# Altium PCB Driveunit_RS485.PcbDoc
Units mm, origin at the board's own origin, x right, y up, seen from the top; angles counter-clockwise.
Board outline 32.16 x 32.01 mm, 4 copper layers (Top Layer, MidLayer1, MidLayer2, Bottom Layer), stack 1.57 mm thick; 41 components, 30 nets, 141 pads, 78 vias.
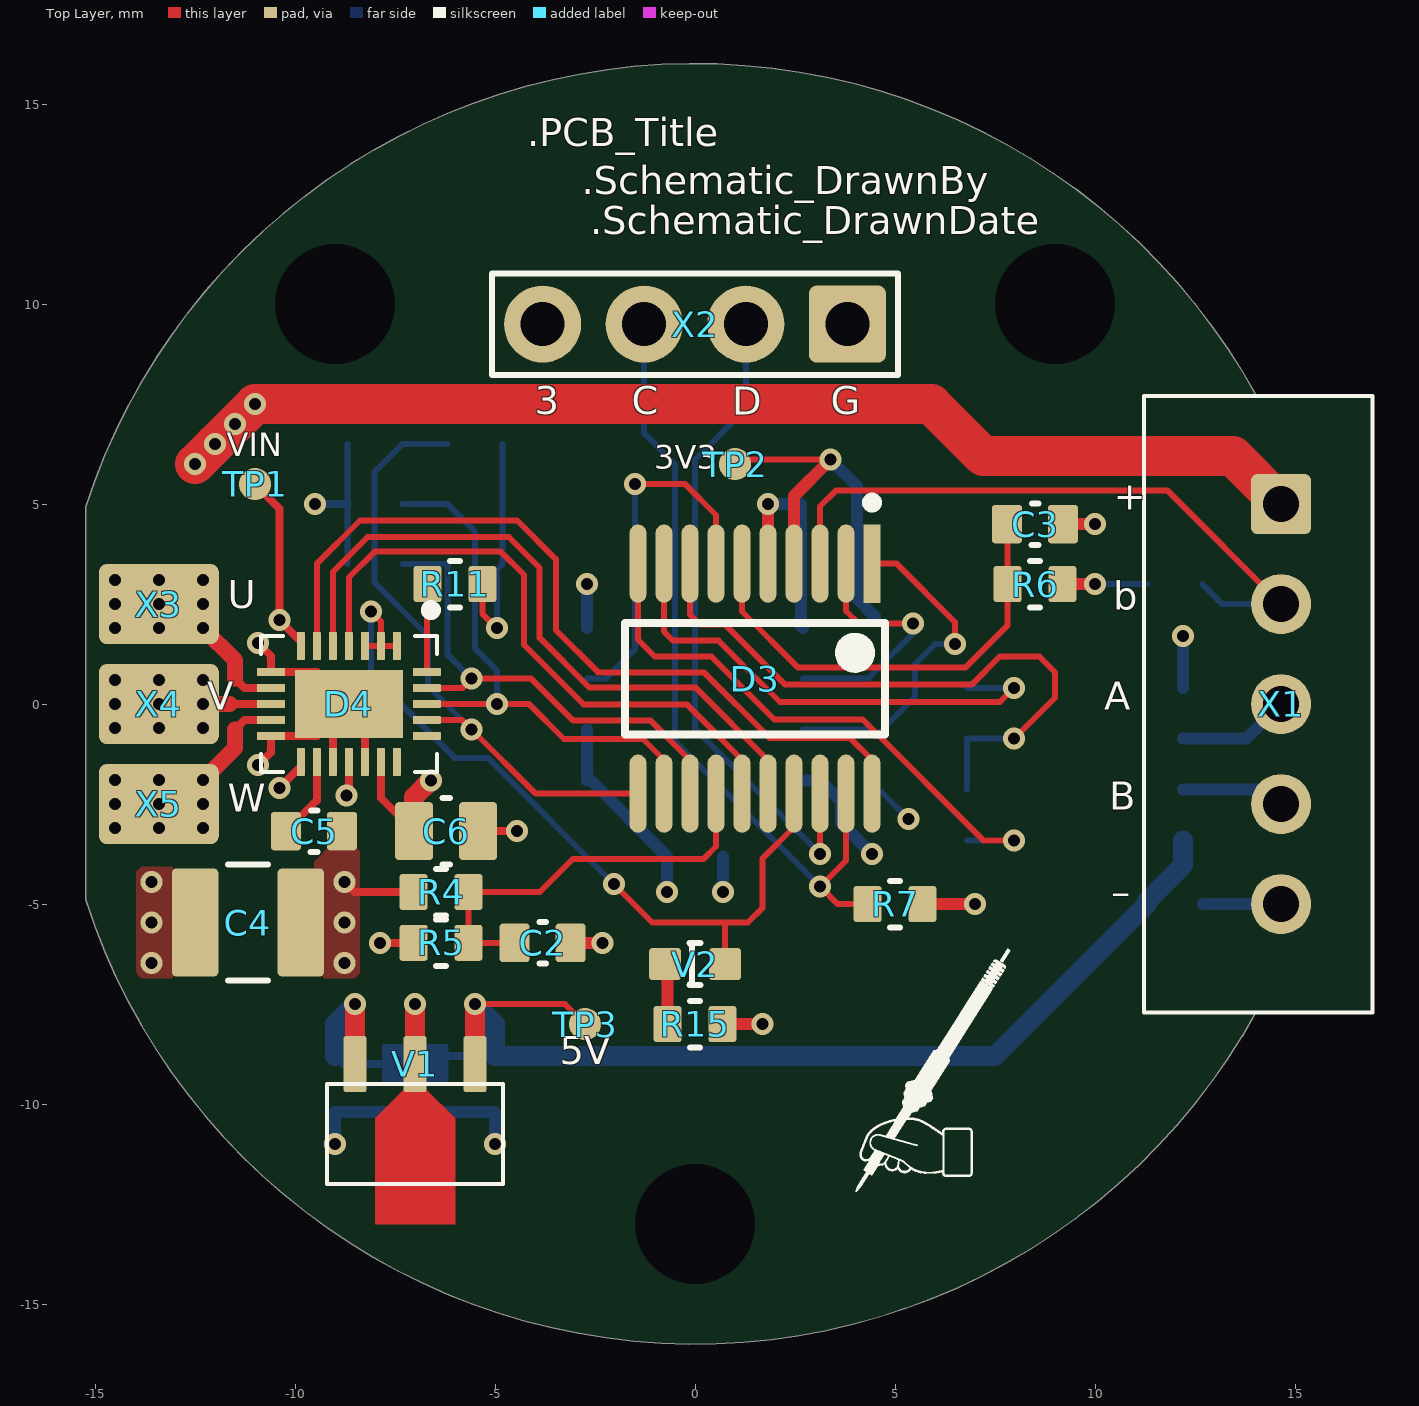
[diagram p0: Top Layer view]
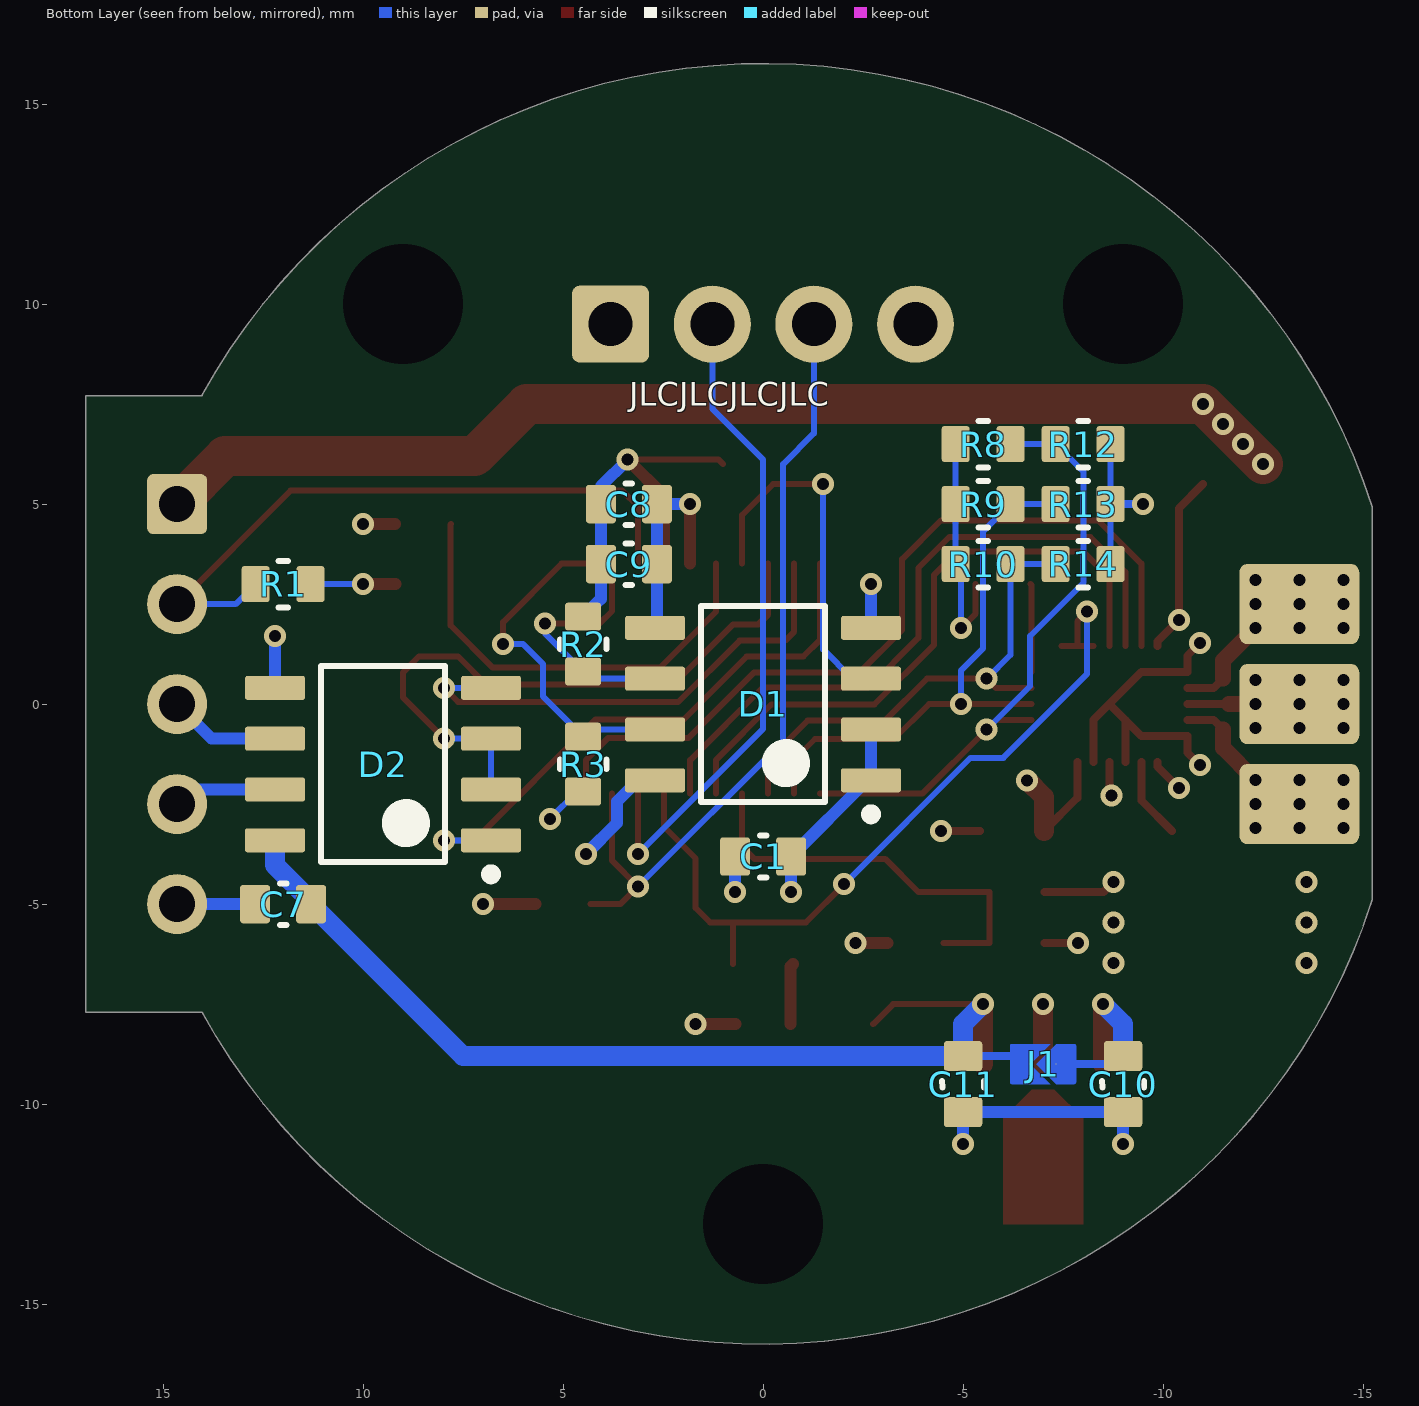
[diagram p1: Bottom Layer view, seen from below]
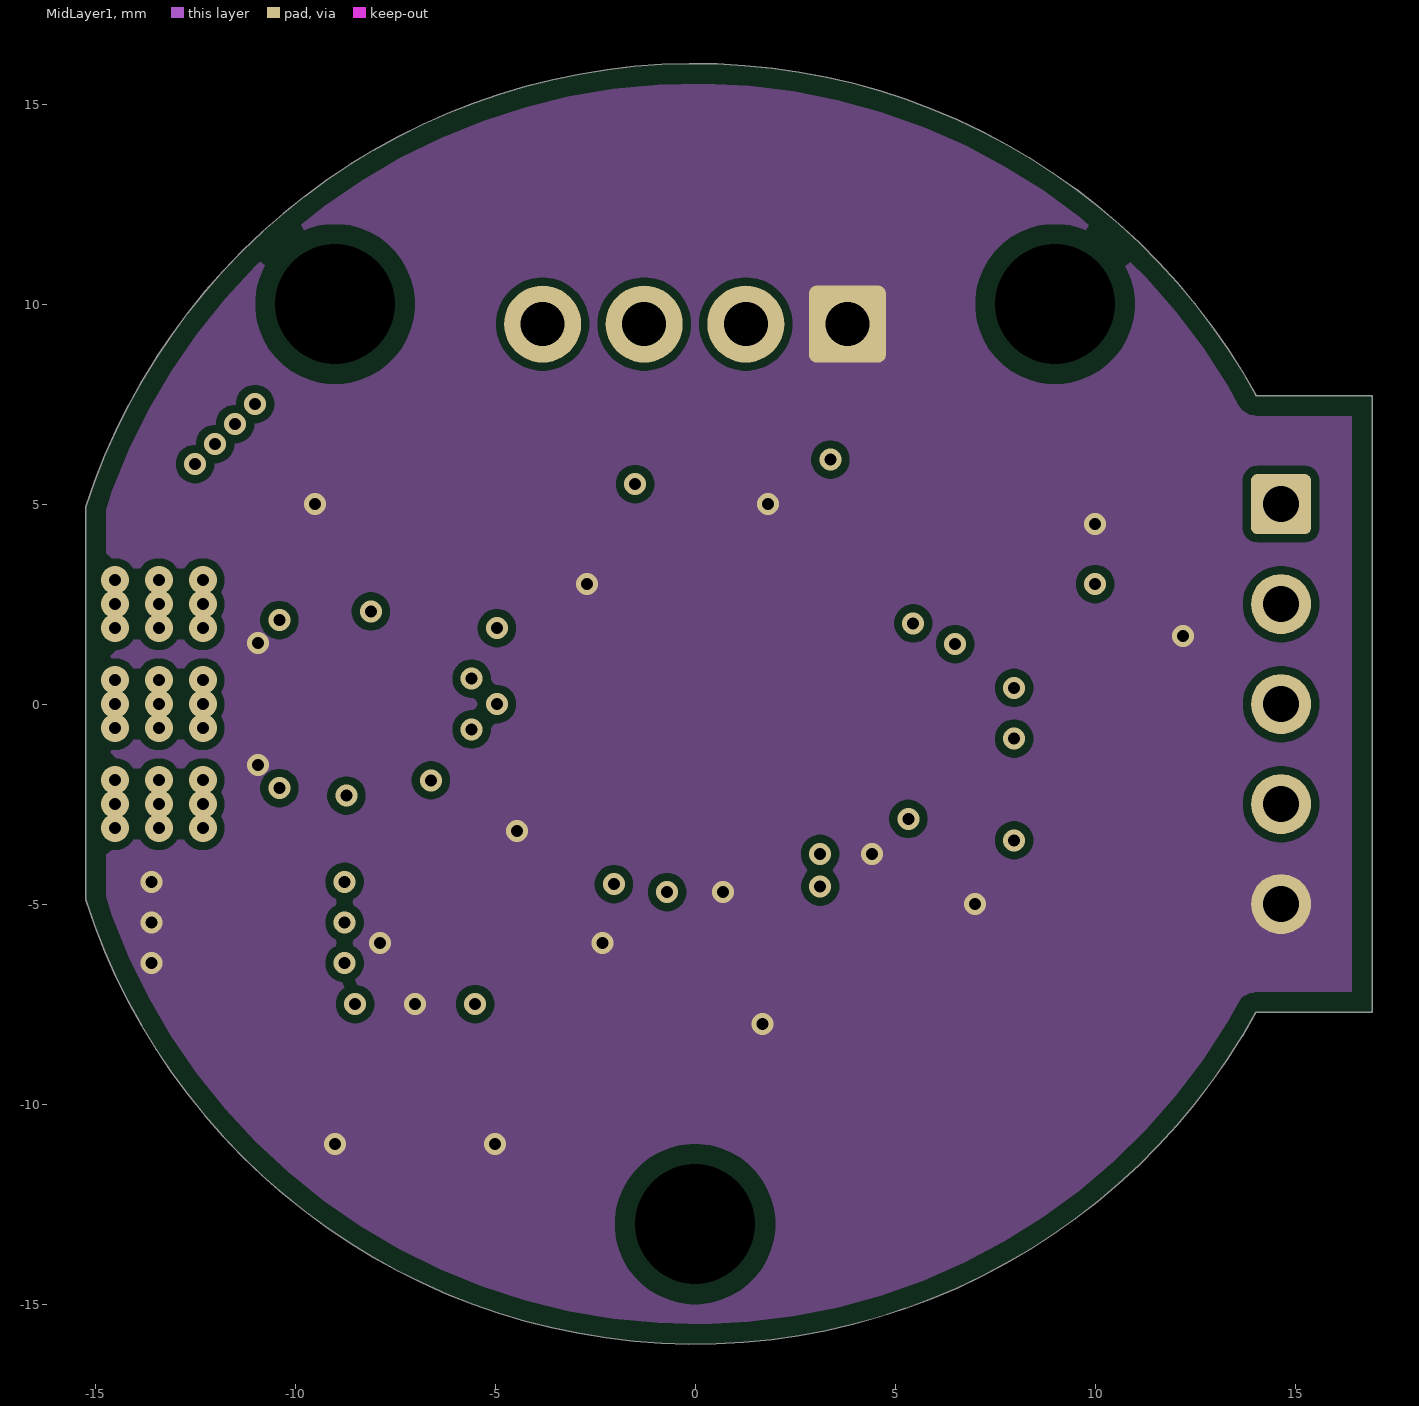
[diagram p2: MidLayer1]
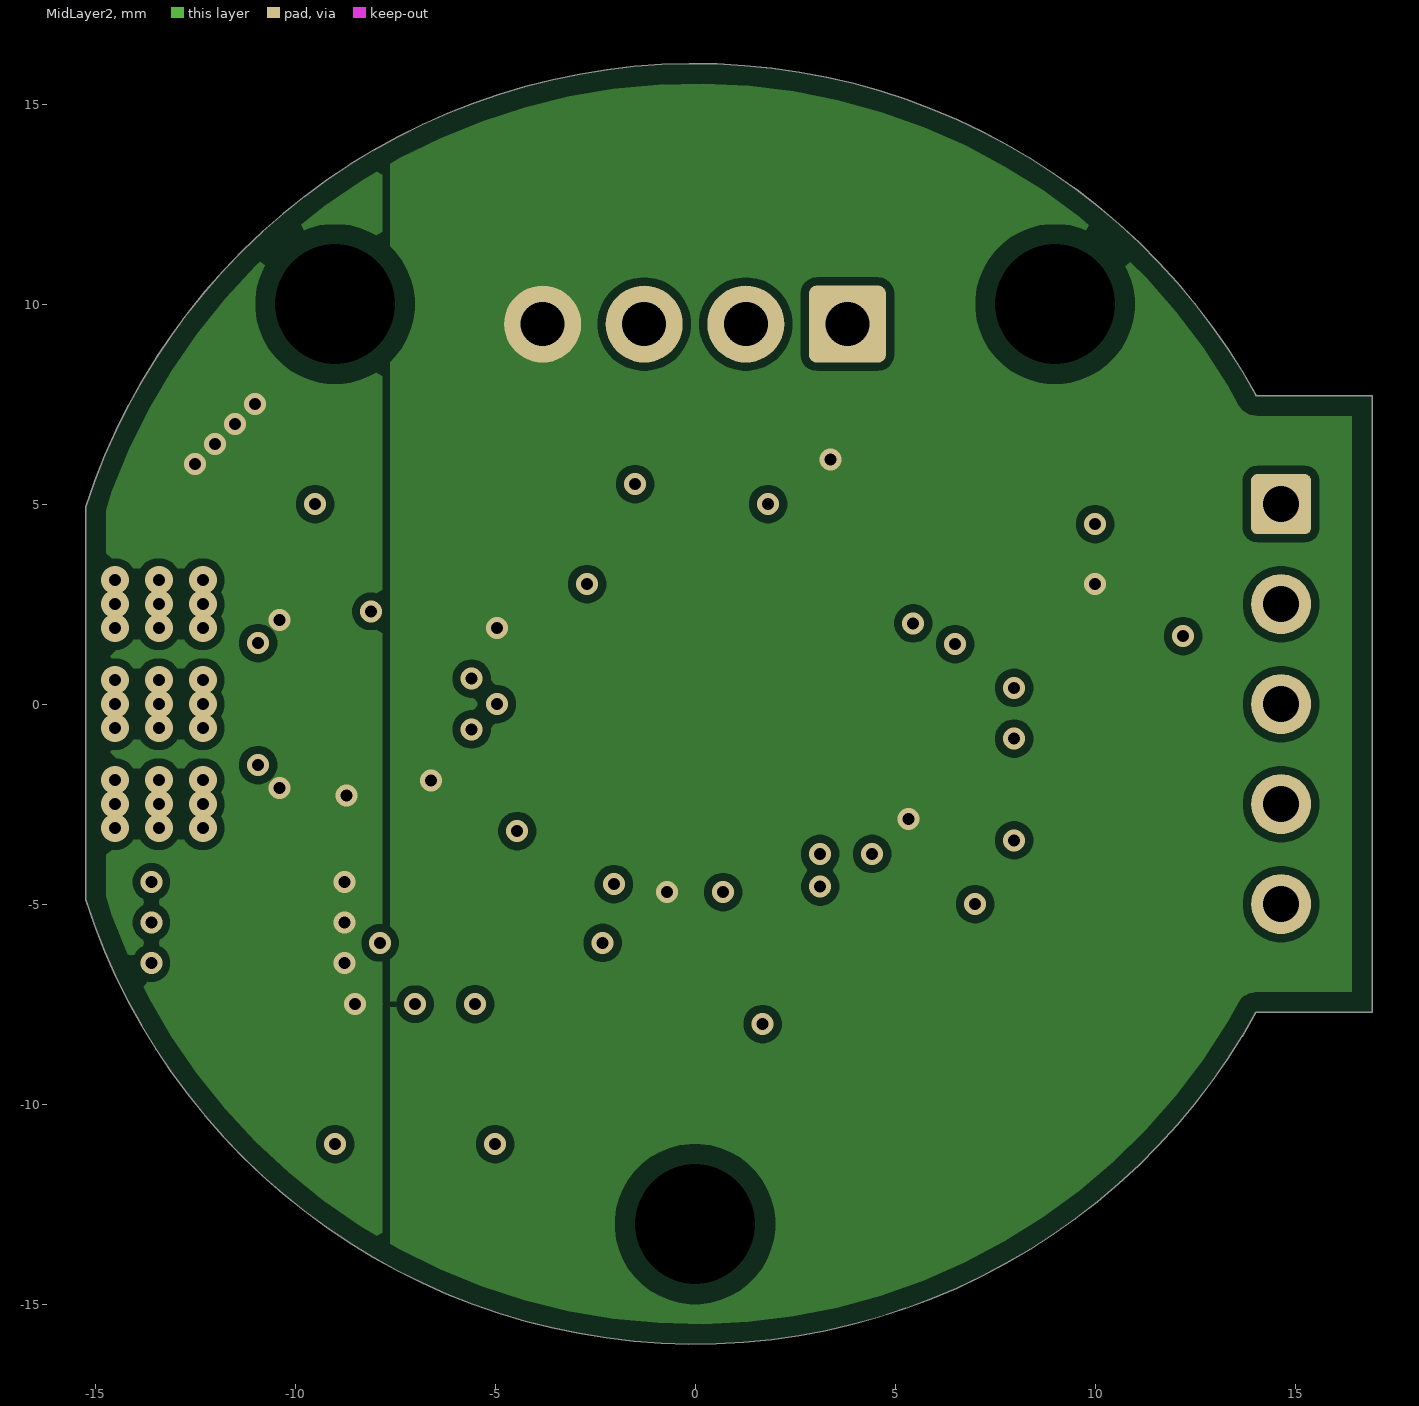
[diagram p3: MidLayer2]
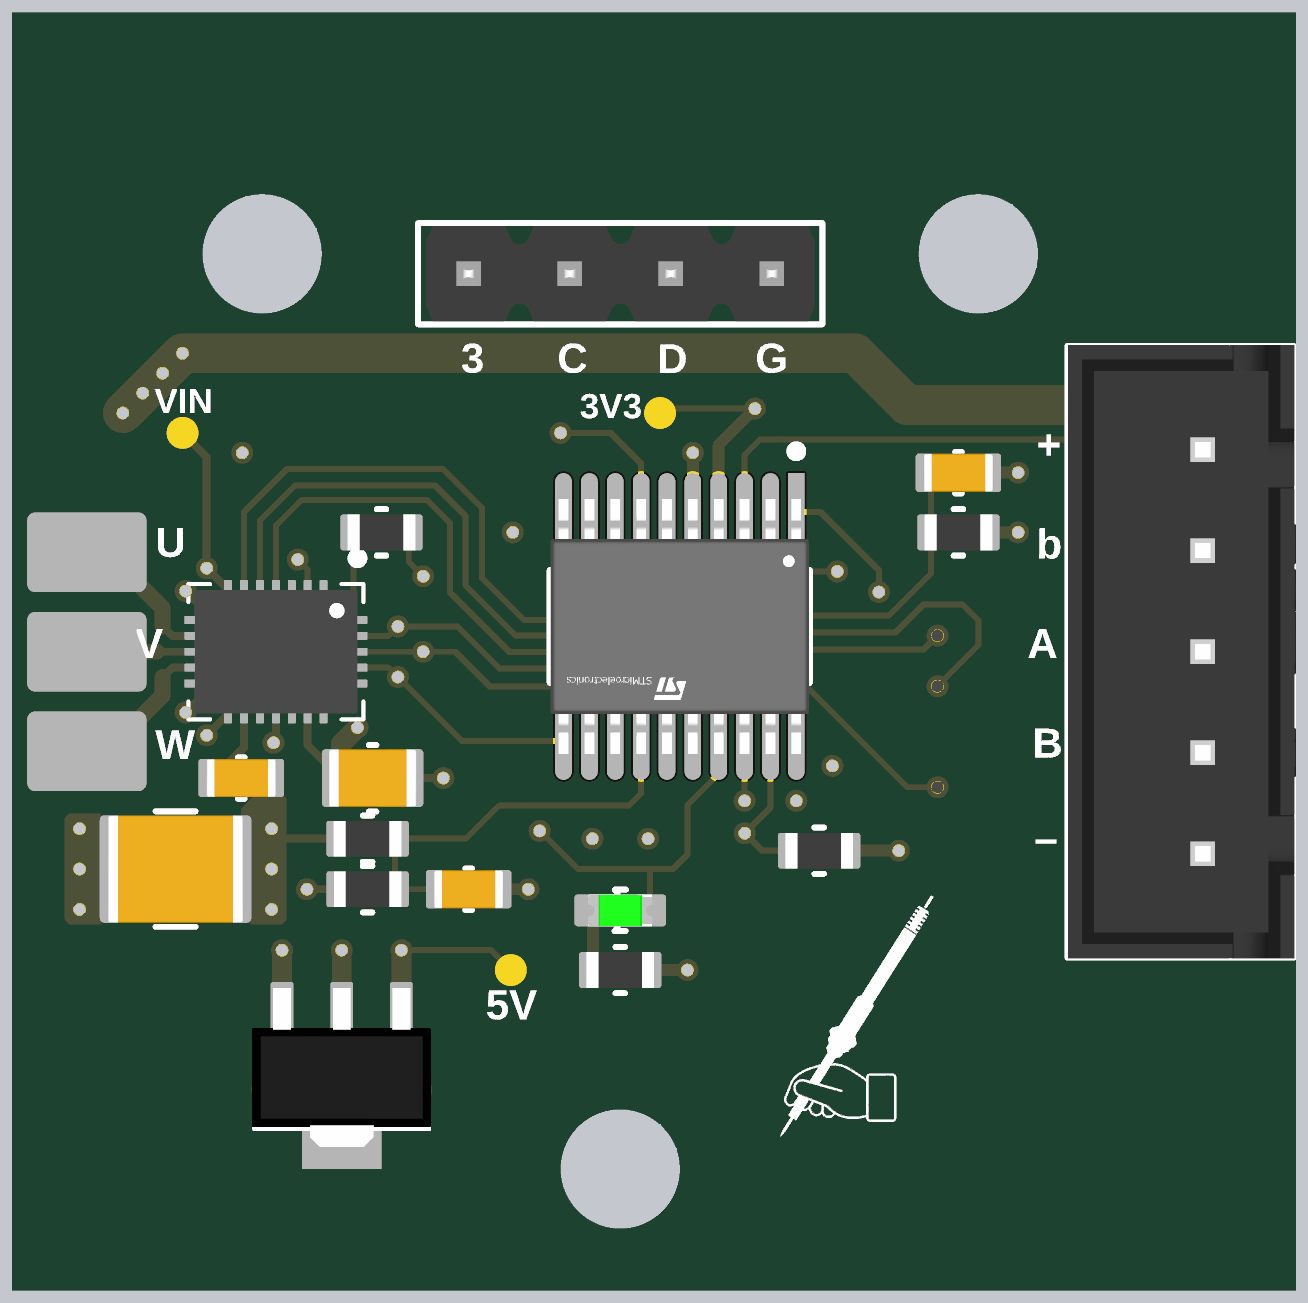
[diagram p4: 3D render of the assembled board from above, using the file's embedded part models]
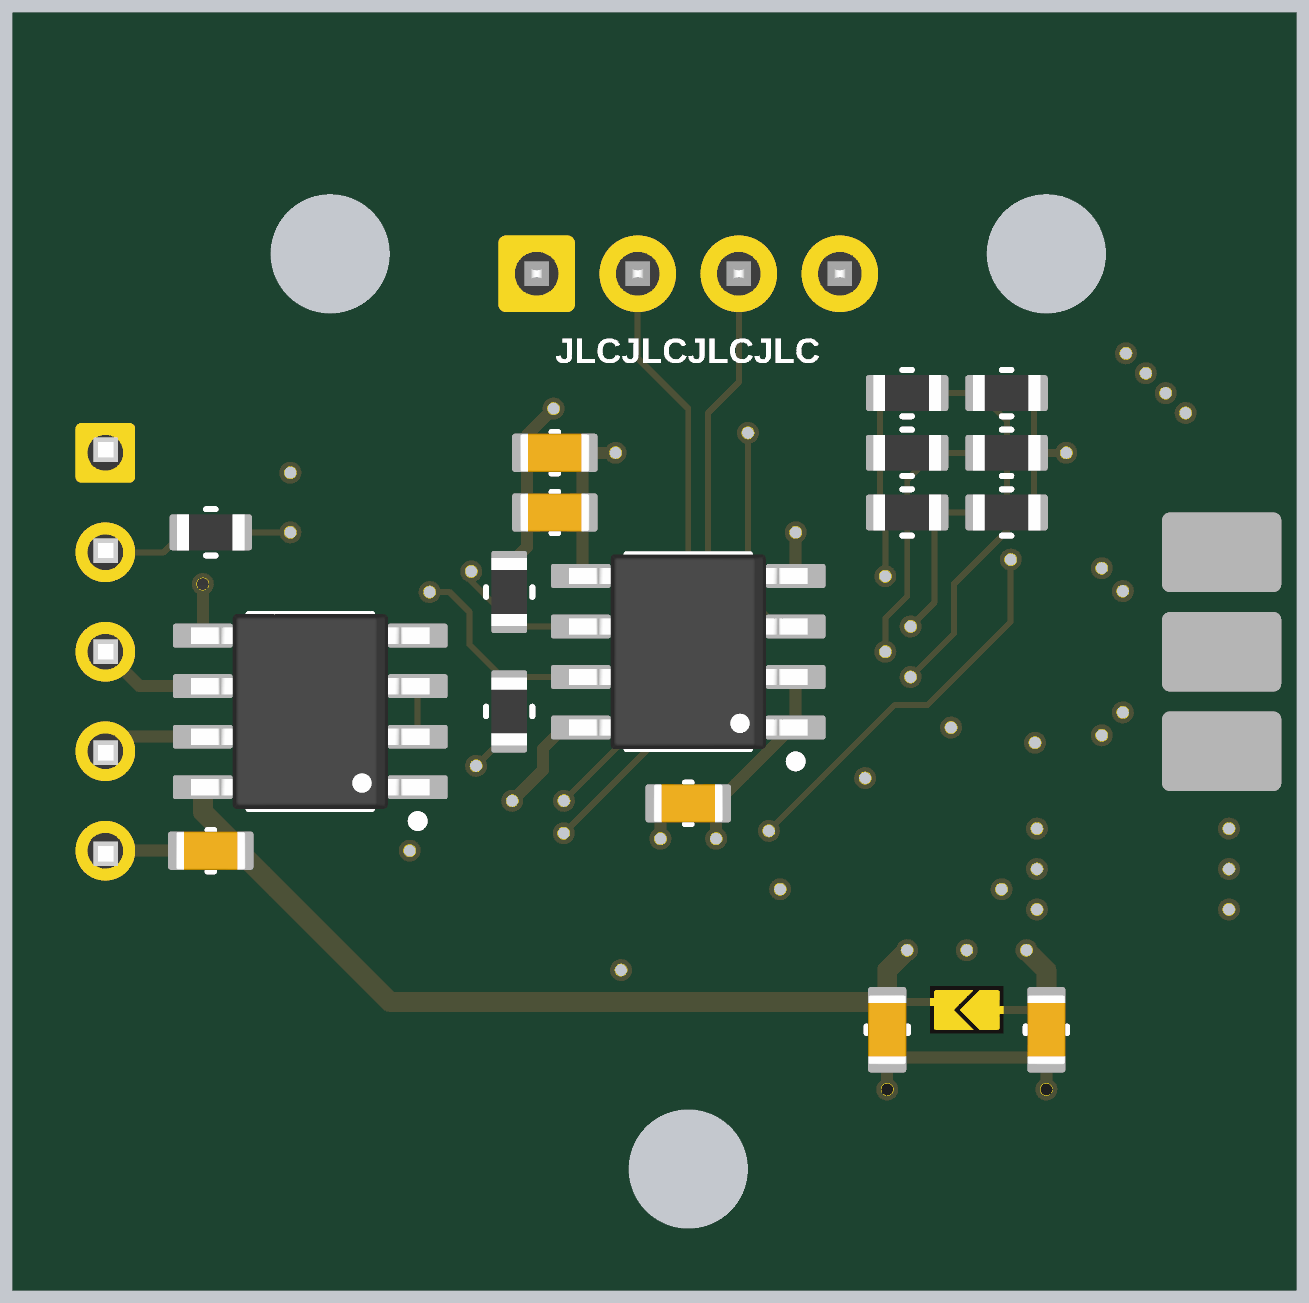
[diagram p5: 3D render of the assembled board from below, using the file's embedded part models]

## Layer stack, top to bottom
Top Solder: solder mask 0.01, Solder Resist, Dk 3.5
Top Layer: signal copper 0.035
Dielectric1: prepreg 0.18, FR-4 (7628), Dk 4.2
Dielectric 2: prepreg 0.18, FR-4 (7628), Dk 4.2
MidLayer1: signal copper 0.035
Core: core 0.71, Dk 4.2
MidLayer2: signal copper 0.035
Dielectric 3: prepreg 0.18, FR-4 (7628), Dk 4.2
Dielectric 4: prepreg 0.18, FR-4 (7628), Dk 4.2
Bottom Layer: signal copper 0.035
Bottom Solder: solder mask 0.01, Solder Resist, Dk 3.5

## Board outline
-15.235,-4.888 ccw(c0,0) 14.021,-7.707 16.929,-7.707 16.929,7.707 14.021,7.707 14.032,7.713 ccw(c0,0) -15.235,4.927

## Design rules (kind name [scope] priority, off if disabled: settings)
AssemblyTestPointUsage [IsTestpoint] p1:
AssemblyTestpoint [IsTestpoint] p1 off: testpointundercomponent=TRUE minsize=0.8 maxsize=1.6 preferedsize=0.85 minholesize=0 maxholesize=0 preferedholesize=0 testpointgrid=0.025 usegrid=FALSE gridtolerance=0 allowsidetop=TRUE allowsidebottom=TRUE minspacing=2.54
BoardOutlineClearance [All and not OnLayer('Top Overlay')] p1: gap=0.5 ignorepadtopadclearanceinfootprint=FALSE except(0: Arc-SplitContinuation Track-SplitContinuation SMDPad-SplitContinuation Fill-SplitContinuation Poly-SplitContinuation Region-SplitContinuation Text-SplitContinuation; 1.5: THPad-SplitContinuation Via-SplitContinuation)
Clearance Clearance_NetClasses [InNetClass('PrimarySide') vs InNetClass('SecondarySide')] p1: gap=1 ignorepadtopadclearanceinfootprint=FALSE except(0: Arc-Hole Track-Hole SMDPad-Hole THPad-Hole Via-Hole Fill-Hole Poly-Hole Region-Hole Text-Hole)
Clearance Clearance_Pri-PE [InNetClass('PrimarySide') vs InNet('EARTH') or InNet('EARTH_G2') or InNet('EARTH_USB') or InNet('NetC3_2')] p2: gap=1 ignorepadtopadclearanceinfootprint=FALSE except(0: Arc-Hole Track-Hole SMDPad-Hole THPad-Hole Via-Hole Fill-Hole Poly-Hole Region-Hole Text-Hole)
Clearance Clearance_Sec-PE [InNetClass('SecondarySide') vs InNet('EARTH') or InNet('EARTH_G2') or InNet('EARTH_USB') or InNet('NetC3_2')] p3: gap=0.5 ignorepadtopadclearanceinfootprint=FALSE except(0: Arc-Hole Track-Hole SMDPad-Hole THPad-Hole Via-Hole Fill-Hole Poly-Hole Region-Hole Text-Hole)
Clearance Clearance_KeepOut [OnLayer('Keep-Out Layer')] p4: gap=0.5 ignorepadtopadclearanceinfootprint=FALSE except(0: Arc-Hole Track-Hole SMDPad-Hole THPad-Hole Via-Hole Fill-Hole Poly-Hole Region-Hole Text-Hole)
Clearance Clearance2Holes [not OnTopLayer AND NOT OnBottomLayer vs (ObjectKind = 'Pad') And (Layer = 'MultiLayer') And (PadIsPlated = 'False')] p5: gap=0.5 ignorepadtopadclearanceinfootprint=FALSE except(0: Arc-Hole Track-Hole SMDPad-Hole THPad-Hole Via-Hole Fill-Hole Poly-Hole Region-Hole Text-Hole)
Clearance Clearance_via2via [IsVia and not Footprint vs IsVia] p6: gap=0.15 ignorepadtopadclearanceinfootprint=FALSE except(0: Arc-Hole Track-Hole SMDPad-Hole THPad-Hole Via-Hole Fill-Hole Poly-Hole Region-Hole Text-Hole)
Clearance [All] p7: gap=0.2 ignorepadtopadclearanceinfootprint=FALSE except(0: Arc-Hole Track-Hole SMDPad-Hole THPad-Hole Via-Hole Fill-Hole Poly-Hole Region-Hole Text-Hole)
ComponentClearance [IsComponent] p1: gap=0.254 collisioncheckmode=3 verticalgap=0.254 showdistances=TRUE donotcheckwithout3dbody=TRUE
DiffPairsRouting [All] p1: maxlimit=0.254 minlimit=0.2 mostfreqgap=0.254 toplayer_minwidth=0.15 toplayer_maxwidth=0.381 toplayer_prefwidth=0.381 midlayer1_minwidth=0.15 midlayer1_maxwidth=0.381 midlayer1_prefwidth=0.381 midlayer2_minwidth=0.15 midlayer2_maxwidth=0.381 midlayer2_prefwidth=0.381 bottomlayer_minwidth=0.15 bottomlayer_maxwidth=0.381 bottomlayer_prefwidth=0.381 maxuncoupledlength=12.7
FabricationTestPointUsage [IsTestpoint] p1: valid=0 allowmultiple=FALSE
FabricationTestpoint [IsTestpoint] p1 off: side=3 testpointundercomponent=TRUE minsize=0.8 maxsize=1.6 preferedsize=0.85 minholesize=0 maxholesize=0 preferedholesize=0 testpointgrid=0.025 allowsidetop=TRUE allowsidebottom=TRUE usegrid=FALSE gridtolerance=0 minspacing=2.54 boardedgeclearance=1.9
HoleSize [All] p1: absolutevalues=TRUE maxlimit=6.4 minlimit=0.2 maxpercent=80.000 minpercent=20.000
MinimumAnnularRing MinimumAnnularRingVia [IsVia] p1: minimumring=0.12
MinimumAnnularRing MinimumAnnularRingDefault [All] p2: minimumring=0.15
MinimumSolderMaskSliver MinimumSolderMaskSliver_Symbols [IsComponent] p1: minsoldermaskwidth=0
MinimumSolderMaskSliver [All] p2: minsoldermaskwidth=0.1
PlaneClearance PlaneClearance_PE [InNet('EARTH_USB')  or InNet('EARTH_G2') or InNet('NetC3_2') or InNet('EARTH')] p1: clearance=1
PlaneClearance PlaneClearance_Holes-via [(IsVia)] p2: clearance=0.35
PlaneClearance PlaneClearance_Holes-Special [(InComponentClass('SpecialConnector'))] p3: clearance=0.35
PlaneClearance [All] p4: clearance=0.5
PlaneConnect "PlaneConnect_Special Con" [(InComponentClass('SpecialConnector'))] p1: planeconnectstyle=Direct reliefexpansion=0.508 reliefentries=4 reliefconductorwidth=0.254 reliefairgap=0.254
PlaneConnect PlaneConnect_Components [(InComponentClass('All Components'))] p2: planeconnectstyle=Relief reliefexpansion=0.35 reliefentries=4 reliefconductorwidth=0.25 reliefairgap=0.25
PlaneConnect [All] p3: planeconnectstyle=Direct reliefexpansion=0.508 reliefentries=4 reliefconductorwidth=0.254 reliefairgap=0.254
PolygonConnect PolygonConnect_Components [(InComponentClass('All Components'))] p1: connectstyle=Direct reliefconductorwidth=0.254 reliefentries=4 polygonreliefangle="90 Angle" airgapwidth=0.254
PolygonConnect [All] p2: connectstyle=Direct reliefconductorwidth=0.254 reliefentries=4 polygonreliefangle="90 Angle" airgapwidth=0.254
RoutingVias Micro-Vias [((ObjectKind = 'Via') AND (StartLayer = 'Top Layer') AND (StopLayer = 'InternalPlane1')) OR ((ObjectKind = 'Via') AND (StartLayer = 'Bottom Layer') AND (StopLayer = 'InternalPlane2'))] p1: holewidth=0.15 width=0.35 viastyle="Through Hole" minholewidth=0.15 minwidth=0.35 maxholewidth=0.15 maxwidth=0.35
RoutingVias [All] p2: holewidth=0.2 width=0.55 viastyle="Through Hole" minholewidth=0.2 minwidth=0.55 maxholewidth=0.3 maxwidth=0.7 useviatemplates=TRUE viatemplateguid#1={409902A1-507B-49B3-8F71-9776A71DEEE2} viatemplateguid#2={2196D2C4-073D-4DA6-BD0C-B2EDFBD47095} viatemplatename#1=v55h30m0mx0 viatemplatename#2=v70h30m0mx0
SilkToSilkClearance [All] p1: silktosilkclearance=0.2
SilkToSolderMaskClearance SilkToPadClearance [IsPad] p1: minsilkscreentomaskgap=0.2 clearancetoexposedcopper=TRUE
SolderMaskExpansion SolderMaskExpansionVias [IsVia] p1: expansion=0.15 istentingtop=FALSE soldermaskfromhole=TRUE
SolderMaskExpansion SolderMaskExpansionHoles [(ObjectKind = 'Pad') And (PadIsPlated = 'False') And (AsMM(PadXSize_AllLayers) = 0) And (AsMM(PadYSize_AllLayers) = 0)] p2: expansion=0.05 istentingtop=FALSE soldermaskfromhole=TRUE
SolderMaskExpansion SolderMaskExpansionSTD [IsPad  Or IsRegion] p3: expansion=0.05 istentingtop=FALSE
ViasUnderSMD ViasUnderSMD_TP [HasFootprint('TP_1.0mm')] p1: allowed=TRUE
ViasUnderSMD [All] p2 off: allowed=FALSE
Width [All] p1: maxlimit=2 minlimit=0.15 preferedwidth=0.2 minimp=50.000000 maximp=50.000000 favimp=50.000000
18 further rules are at their usual default settings.

## Classes and differential pairs
component class Through-Hole_Assy: X1 X2
component class Testpoint: TP1 TP2 TP3 X3 X4 X5
component class Surface_Assy: C1 C2 C3 C4 C5 C6 C7 C8 C9 C10 C11 D1 D2 D3 D4 J1 R1 R2 R3 R4 R5 R6 R7 R8 R9 R10 R11 R12 R13 R14 R15 V1 V2

## Components (designator, comment, footprint, x,y, rotation, side; value= is the part's Value field where it differs from the comment)
C1 "Cap 1u 0603" C-0603_1608_095_L_RF 0,-3.81 r180 bottom value=1µF
C2 "Cap 10n 0603" C-0603_1608_095_L_RF -3.81,-5.969 r180 top value=10nF
C3 "Cap 100n 0603" C-0603_1608_095_L_RF 8.5,4.5 r180 top value=100nF
C4 "CAP 10u 1210" C-1210_3225_230_L_RF -11.176,-5.461 r0 top value=10µF
C5 "Cap 1u 0603" C-0603_1608_095_L_RF -9.525,-3.175 r0 top value=1µF
C6 "CAP 10u 16V 0805" C-0805_2012_145_L_RF -6.223,-3.175 r180 top value=10µF
C7 "Cap 100n 0603" C-0603_1608_095_L_RF 12,-5 r180 bottom value=100nF
C8 "Cap 100n 0603" C-0603_1608_095_L_RF 3.354,5 r0 bottom value=100nF
C9 "Cap 1u 0603" C-0603_1608_095_L_RF 3.354,3.5 r0 bottom value=1µF
C10 "Cap 100n 0603" C-0603_1608_095_L_RF -9,-9.5 r90 bottom value=100nF
C11 "Cap 100n 0603" C-0603_1608_095_L_RF -5,-9.5 r90 bottom value=100nF
D1 "AS5600" SOIC8_N_RF 0,0 r0 bottom
D2 "MAX485ESA" SOIC8_N_RF 9.5,-1.5 r0 bottom
D3 "STM32G030F6P6" TSSOP20_N_RF 1.5,0.635 r270 top
D4 "MP6543HGL" QFN24_5X7_N_RF -8.655,0 r270 top
J1 "Solder jumper 2Pin" J-1206_Solderjumper_2Pin -7,-9 r0 bottom value=Jumper
R1 "Res 10k 0603" R-0603_1608_050_L_RF 12,3 r180 bottom value=10k
R2 "Res 1k 0603" R-0603_1608_050_L_RF 4.5,1.5 r90 bottom value=1k
R3 "Res 1k 0603" R-0603_1608_050_L_RF 4.5,-1.5 r270 bottom value=1k
R4 "Res 10k 0603" R-0603_1608_050_L_RF -6.35,-4.699 r180 top value=10k
R5 "Res 1k 0603" R-0603_1608_050_L_RF -6.35,-5.969 r0 top value=1k
R6 "Res 10k 0603" R-0603_1608_050_L_RF 8.5,3 r180 top value=10k
R7 "Res 1k 0603" R-0603_1608_050_L_RF 5,-5 r180 top value=1k
R8 "Res 10k 0603" R-0603_1608_050_L_RF -5.5,6.5 r0 bottom value=10k
R9 "Res 10k 0603" R-0603_1608_050_L_RF -5.5,5 r0 bottom value=10k
R10 "Res 10k 0603" R-0603_1608_050_L_RF -5.5,3.5 r0 bottom value=10k
R11 "Res 1k 0603" R-0603_1608_050_L_RF -6,3 r0 top value=1k
R12 "Res 10k 0603" R-0603_1608_050_L_RF -8,6.5 r0 bottom value=10k
R13 "Res 10k 0603" R-0603_1608_050_L_RF -8,5 r0 bottom value=10k
R14 "Res 10k 0603" R-0603_1608_050_L_RF -8,3.5 r0 bottom value=10k
R15 "Res 1k 0603" R-0603_1608_050_L_RF 0,-8 r180 top value=1k
TP1 "TestPoint 0.8mm" TP_0.8mm -11,5.5 r90 top value=TP
TP2 "TestPoint 0.8mm" TP_0.8mm 1,6 r90 top value=TP
TP3 "TestPoint 0.8mm" TP_0.8mm -2.75,-8 r0 top value=TP
V1 "L78L05" SOT-89-3 -7,-10.5 r180 top
V2 "LED SMD 0603 Green" LED-0603_1608_Green_L_RF 0,-6.5 r180 top value=green
X1 "CONN HEADER XH 5POS THT" X-0149X0057-R_M05_P0250_JST_B5B-XH-A 14.65,0 r90 top locked value=B5B-XH-A
X2 "CONN HEADER 4POS 1ROW THT 2.54MM" X-0101X0025_R_FCI_77311-118-04LF 0,9.5 r180 top value=77311-118-04LF
X3 "Solderpad_2x3" LöTPAD_2X3 -13.405,2.5 r90 top
X4 "Solderpad_2x3" LöTPAD_2X3 -13.405,0 r90 top
X5 "Solderpad_2x3" LöTPAD_2X3 -13.405,-2.5 r90 top

## Footprints (in the part's own frame and the unit in brackets; to place one, negate y for a bottom-side part, rotate by r counter-clockwise, add the part's x,y. Pads: shape width x height; smd on the part's side, far side on the other; paste and mask are expansions set on the pad)
C-0603_1608_095_L_RF [mm] "Capacitor Chip 0603 Reflow; IPC7351C; Least; A.0"
  rrect20% 0.75x0.96 smd: 1(-0.7,0) 2(0.7,0)
  silkscreen extent -0.08,-0.52 0.08,0.52, body extent -0.87,-0.48 0.88,0.48, height 0.95
C-0805_2012_145_L_RF [mm] "Capacitor Chip 0805 Reflow; IPC7351C; Least; A.0"
  rrect20% 0.95x1.45 smd: 1(-0.8,0) 2(0.8,0)
  silkscreen extent -0.09,-0.83 0.09,0.84, body extent -1.1,-0.72 1.11,0.73, height 1.45
C-1210_3225_230_L_RF [mm] "Capacitor Chip 1210 Reflow; IPC7351C; Least; A.1"
  rrect20% 1.17x2.7 smd: 1(-1.32,0) 2(1.32,0)
  silkscreen extent -0.5,-1.45 0.5,1.45, body extent -1.7,-1.35 1.7,1.35, height 2.3
J-1206_Solderjumper_2Pin [mil] "SolderJumper 2Pin"
  round 1 smd paste-99999 mask+1.18: 1(-12.8,0) 2(12.8,0)
  Top Layer region: 32.48,-17.72 32.48,17.72 32.33,18.47 31.9,19.11 31.27,19.53 30.51,19.68 30.51,19.69 -6.89,19.69 12.8,0 -6.89,-19.69 30.51,-19.69 31.26,-19.54 31.9,-19.11 32.33,-18.47 32.48,-17.72
  Top Layer region: -32.48,-17.72 -32.48,17.72 -32.33,18.47 -31.9,19.11 -31.27,19.53 -30.51,19.68 -30.51,19.69 -12.8,19.69 6.89,0 -12.8,-19.69 -30.51,-19.69 -31.27,-19.54 -31.9,-19.11 -32.33,-18.47 -32.48,-17.72
LED-0603_1608_Green_L_RF [mm] "LED Chip 0603 Reflow_Green, LTST-C190KGKT"
  rrect20% 0.8x0.8 smd: 1(-0.75,0) 2(0.75,0)
  silkscreen extent -0.14,-0.52 0.14,0.52, body extent -0.81,-0.4 0.81,0.4, height 0.75
LöTPAD_2X3 [mm]
  rrect20% 2x3 smd: 1(0,0)
  rrect20% 2x3 smd far side: 1(0,0)
QFN24_5X7_N_RF [mm] "QFN, 24-Leads, Body 3.00x4.00mm, Pitch 0.40mm, Thermal Pad 1.70x2.70mm, IPC Medium Density"
  rrect20% 0.7x0.2 smd: 1(-1.45,1.2) 2(-1.45,0.8) 3(-1.45,0.4) 4(-1.45,0) 5(-1.45,-0.4) 6(-1.45,-0.8) 7(-1.45,-1.2) 13(1.45,-1.2) 14(1.45,-0.8) 15(1.45,-0.4) 16(1.45,0) 17(1.45,0.4) 18(1.45,0.8) 19(1.45,1.2)
  rrect20% 0.2x0.7 smd: 8(-0.8,-1.95) 9(-0.4,-1.95) 10(0,-1.95) 11(0.4,-1.95) 12(0.8,-1.95) 20(0.8,1.95) 21(0.4,1.95) 22(0,1.95) 23(-0.4,1.95) 24(-0.8,1.95)
  rect 1.7x2.7 smd: 25(0,0)
  silkscreen extent -2.47,-2.2 1.7,2.2, body extent -1.55,-2.05 1.55,2.05, height 1
R-0603_1608_050_L_RF [mm] "Resistor Chip 0603 Reflow; IPC7351C; Least; A.1"
  rrect20% 0.7x0.9 smd: 1(-0.685,0) 2(0.685,0)
  silkscreen extent -0.12,-0.58 0.12,0.58, body extent -0.85,-0.45 0.85,0.45, height 0.5
SOIC8_N_RF [mm] "SOIC, 8-Leads, Body 4.90x3.90mm, Pitch 1.27mm, IPC Medium Density"
  rrect20% 1.5x0.6 smd: 1(-2.7,1.905) 2(-2.7,0.635) 3(-2.7,-0.635) 4(-2.7,-1.905) 5(2.7,-1.905) 6(2.7,-0.635) 7(2.7,0.635) 8(2.7,1.905)
  silkscreen extent -2.82,-2.45 1.55,2.88, body extent -3,-2.45 3,2.45, height 1.75
SOT-89-3 [mm]
  rrect20% 0.57x1.4 smd: 1(-1.5,-1.5) 2(0,-1.5) 3(1.5,-1.5)
  Top Layer region: -0.285,-0.857 -1,-0.142 -1,2.5 1,2.5 1,-0.142 0.285,-0.857
  silkscreen extent -2.2,-1 2.2,1.5, body extent -2.25,-2.05 2.25,1.95, height 1.6
TP_0.8mm [mm] "Testpoint 0.8mm"
  round 0.8 smd paste-0.5: 1(0,0)
TSSOP20_N_RF [mm]
  rect 1.955x0.421 smd mask+0.05: 1(-2.875,2.925)
  rrect100% 1.955x0.421 smd mask+0.05: 2(-2.875,2.275) 3(-2.875,1.625) 4(-2.875,0.975) 5(-2.875,0.325) 6(-2.875,-0.325) 7(-2.875,-0.975) 8(-2.875,-1.625) 9(-2.875,-2.275) 10(-2.875,-2.925) 11(2.875,-2.925) 12(2.875,-2.275) 13(2.875,-1.625) 14(2.875,-0.975) 15(2.875,-0.325) 16(2.875,0.325) 17(2.875,0.975) 18(2.875,1.625) 19(2.875,2.275) 20(2.875,2.925)
  silkscreen extent -4.53,-3.25 1.4,3.25, body extent -4.35,-3.75 4.35,3.75, height 0.25
X-0101X0025_R_FCI_77311-118-04LF [mm] "Pin Headder; 2.54mm, FCI"
  rrect20% 1.925x1.925 hole 1.1: 1(-3.81,0)
  round 1.925 hole 1.1: 2(-1.27,0) 3(1.27,0) 4(3.81,0)
  silkscreen extent -5.08,-1.27 5.08,1.27, body extent -4.88,-1.2 4.88,1.21, height 8.38
X-0149X0057-R_M05_P0250_JST_B5B-XH-A [mm] "JST XH Connector 2.5mm Pitch JST_B5B-XH-A"
  rrect20% 1.5x1.5 hole 0.9: 1(5,0)
  round 1.5 hole 0.9: 2(2.5,0) 3(0,0) 4(-2.5,0) 5(-5,0)
  silkscreen extent -7.71,-2.29 7.71,3.43, body extent -7.71,-2.33 7.71,3.4, height 7

## Part data
C1 C5 C9: library part CMP-001-0045-3, "Cap Cer SMD 1u 16V 10% 0603 X7R", Case / Package=0603, Manufacturer=AVX, Manufacturer 2=KEMET, Manufacturer Part Number=0603YC105KAT2A, Manufacturer Part Number 2=C0603C105K4RACTU, ClassName=Surface_Assy, GPV_Number=1749.0125, PartStatus=Release, Prefered=true, Technology=SMT, User=epph
C2: library part CMP-001-0040-3, "Cap Cer SMD 10n 50V 10% 0603 X7R", Case / Package=0603, Manufacturer=AVX, Manufacturer Part Number=06035C103KAT, ClassName=Surface_Assy, GPV_Number=1749.0004, MNL_Number=22310403, PartStatus=Release, Prefered=true, Technology=SMT, User=epph
C3 C7 C8 C10 C11: library part CMP-001-0036-2, "Cap Cer SMD 100n 100V 10% 0603 X7R", Case / Package=0603, Manufacturer=MURATA, Manufacturer Part Number=GRM188R72A104KA35, ClassName=Surface_Assy, ComponentLink1Description=Datasheet, ComponentLink1URL=https://datasheet.ciiva.com/34302/1857815-34302863.pdf, GPV_Number=1749.0196, PartStatus=Release, Prefered=false, Technology=SMT, User=zupa
C4: library part CMP-001-0198-2, "CAP CER 10uF 50V X7S 1210", Case / Package=1210, Manufacturer=TDK, Manufacturer Part Number=C3225X7S1H106K250AE, ClassName=Surface_Assy, ComponentLink1Description=Datasheet, ComponentLink1URL=https://datasheet.ciiva.com/24218/c3225x7s1h106k250ae-265440-24218657.pdf?src-supplier=Mouser, GPV_Number=1752.0100, PartStatus=Release, Technology=SMT, User=zupa
C6: library part CMP-001-0177-2, "Cap Cer SMD 10u 16V 10% 0805 X5R", Case / Package=0805, Manufacturer=AVX, Manufacturer Part Number=0805YD106KAT2A, ClassName=Surface_Assy, ComponentLink1Description=Datasheet, ComponentLink1URL=https://datasheet.ciiva.com/152/cx5r-152114.pdf, GPV_Number=1750.0241, PartStatus=Release, Prefered=true, Technology=SMT, User=zupa
D1: "IC Sensor Rotation Magnet 12bit", Case/Package=SO-8, Manufacturer=AMS, ClassName=Surface_Assy, Footprint_validated=No, GPV_Number=xxxx.xxxx, Manufacturer Part Number=AS5600, MNL_Number=xxxxxxxx, Part_validated=No, PartStatus=New, System=-, Technology=SMT
D2: "IC Transceiver RS485 5V", Case/Package=SO8, Manufacturer=Maxim, ClassName=Surface_Assy, Footprint_validated=No, Manufacturer Part Number=MAX485ESA, MNL_Number=xxxxxxxx, Part_validated=No, PartStatus=New, System=-, Technology=SMT
D3: "IC MCU Cortex M0+ 32K Flash, 8K RAM, 64MHz", Case/Package=TSSOP20, Manufacturer=ST, Supplier Part Number 1=STM32G030F6P6TR, ClassName=Surface_Assy, Footprint_validated=No, GPV_Number=xxxx.xxxx, Manufacturer Part Number=STM32G030F6P6, MNL_Number=xxxxxxxx, Part_validated=No, PartStatus=New, Supplier 1="Arrow Electronics", System=-, Technology=SMT
D4: library part MP6543HGL-A-P, "Motor Driver 3-Phase 3-22V 2A", Case/Package=QFN-24, Manufacturer="Monolithic Power Systems", ClassName=Surface_Assy, Footprint_validated=No, GPV_Number=xxxx.xxxx, Manufacturer Part Number=MP6543HGL-A-P, MNL_Number=xxxxxxxx, Part_validated=No, PartStatus=New, System=-, Technology=SMT
J1: library part CMP-00136-2, ClassName=Surface_Assy, PartStatus=Release, Technology=SYM, User=epph
R1 R4 R6 R8 R9 R10 R12 R13 R14: library part CMP-001-0241-3, "Res SMD 10k 1% 0.1W 0603", Case / Package=0603, Manufacturer=YAGEO, Manufacturer Part Number=RC0603FR-0710KL, ClassName=Surface_Assy, ComponentLink1Description=Datasheet, ComponentLink1URL=https://datasheet.ciiva.com/11808/0900766b80f96399-11808280.pdf, GPV_Number=1922.0100, MNL_Number=15310022, PartStatus=Release, Prefered=true, Technology=SMT, User=zupa
R2 R3 R5 R7 R11 R15: library part CMP-001-0250-3, "Res SMD 1k 1% 0.1W 0603", Case / Package=0603, Manufacturer=YAGEO, Manufacturer Part Number=RC0603FR-071KL, ClassName=Surface_Assy, ComponentLink1Description=Datasheet, ComponentLink1URL=https://datasheet.ciiva.com/11808/0900766b80f96399-11808280.pdf, GPV_Number=1922.0011, MNL_Number=15310012, PartStatus=Release, Prefered=true, Technology=SMT, User=zupa
TP1 TP2 TP3: library part CMP-001-1515-1, ClassName=Testpoint, GPV_Number=-, PartStatus=Release, Technology=SMT, User=zupa
V1: "IC REG 5V SOT-89-3 7-30V 100mA", Case/Package=SOT-89-3, Manufacturer=ST, ClassName=Surface_Assy, Footprint_validated=No, GPV_Number=xxxx.xxxx, Manufacturer Part Number=L78L05, MNL_Number=xxxxxxxx, Part_validated=No, PartStatus=New, System=-, Technology=SMT
V2: library part CMP-001-1208-7, "LED Green LTST-C190KGKT 0603", Case / Package=0603, Manufacturer="Lite-On Inc", Manufacturer Part Number=LTST-C190KGKT, ClassName=Surface_Assy, GPV_Number=1602.0827, PartStatus=Release, Technology=SMT, User=epph
X1: library part CMP-00143-4, "CONN HEADER  5POS_JST_B5B-XH", Manufacturer=JST, Manufacturer Part Number=B5B-XH-A, ClassName=Through-Hole_Assy, GPV_Number=4401.4954, PartStatus=Release, System=Connector, Technology=THT, User=balu
X2: library part CMP-001-1284-4, "CONN HEADER 4POS 1ROW THT 2.54MM FCI 77311-118-04LF", Manufacturer=FCI, Manufacturer Part Number=77311-118-04LF, ClassName=Through-Hole_Assy, ComponentLink1Description=Datasheet, ComponentLink1URL=http://portal.fciconnect.com/Comergent//fci/drawing/77311.pdf, GPV_Number=4401.2630, PartStatus=Release, System=Connector, Technology=THT, User=zupa
X3 X4 X5: library part Lötpad_2mmx3mm, "Solderpad 2mm x 3mm", Case/Package=-, ClassName=Testpoint, Footprint_validated=No, GPV_Number=xxxx.xxxx, Manufacturer=-, Manufacturer Part Number=-, MNL_Number=xxxxxxxx, Part_validated=No, PartStatus=New, System=Connector, Technology=SMT

## Free pads (board coordinates)
  round 0 hole 3 unplated: 7(-9,10) 7(9,10) 9(0,-13)

## Via types
v1: diameter 0.55, hole 0.3, Top Layer to Bottom Layer, tented both sides, 51 vias
v2: diameter 0.7, hole 0.3, Top Layer to Bottom Layer, tented both sides, 27 vias

## Nets (pads, with @x,y where several pads share a name; then routed paths per layer and width w, separated by ;. In a path a pad name is that pad's centre, name@x,y a point inside that pad or via, vN(x,y) a via of type N, cw(c..) or ccw(c..) an arc to the next point about the centre after c; other vN are vias at no path point)
+3V3: C1.2 C6.2 C8.2 C9.2 D1.1 D1.2 D3.4 D4.18 R1.2 R2.2 R3.2 R6.1 R8.2 R9.2 R10.2 R11.2 TP2.1 X2.4 | length 27.4
  Top Layer w0.15: R11.2 -5.315,2.261 v1(-4.952,1.898) ; TP2.1 1.111,6.111 v1(3.385,6.111)
  Top Layer w0.2: D4.18 -7.855,-2.343 C6.2
  Top Layer w0.3: D3.4 2.475,5.201 v1(3.385,6.111) ; R6.1 v1(10,3)
  Top Layer w0.5: C6.2 -7.023,-2.324 v1(-6.604,-1.905)
  Bottom Layer w0.15: v1(-4.952,1.898) -4.952,3.363 R10.2 -4.815,6 R8.2 ; R3.2 4.649,-2.185 v1(5.332,-2.868) ; v1(10,3) R1.2
  Bottom Layer w0.3: D1.2 D1.1 -2.605,-1.905 C1.2 v1(-0.7,-4.699) ; v1(3.385,6.111) 4.054,5.442 C8.2 C9.2 4.054,2.631 R2.2
+5V: C7.2 C11.2 D2.8 J1.2 TP3.1 V1.1 | length 27.2
  Top Layer w0.15: v1(-5.5,-7.5) -3.25,-7.5 TP3.1
  Top Layer w0.5: V1.1 v1(-5.5,-7.5)
  Bottom Layer w0.2: -6.352,-8.8 C11.2
  Bottom Layer w0.5: v1(-5.5,-7.5) -5,-8 C11.2 7.5,-8.8 C7.2 11.3,-4.926 12.2,-4.026 D2.8
ADC_Angle: D1.3 D3.7 | length 9.2
  Top Layer w0.15: v1(-1.5,5.5) -0.247,5.5 0.525,4.728 D3.7
  Bottom Layer w0.15: D1.3 -2.234,0.635 -1.5,1.369 v1(-1.5,5.5)
ADC_CURR_U: D3.11 D4.21 R8.1 R12.2 | length 15.6
  Top Layer w0.15: D4.21 -5.823,-0.4 v1(-5.588,-0.635) -3.983,-2.24 D3.11
  Bottom Layer w0.15: R8.1 R12.2 -8.01,5.805 -8.01,3.037 -6.675,1.702 -6.675,0.452 v1(-5.588,-0.635)
ADC_CURR_V: D3.12 D4.22 R9.1 R13.2 | length 14
  Top Layer w0.15: D4.22 v1(-4.953,0) -4.149,0 -3.275,-0.874 -1.3,-0.874 -0.775,-1.399 D3.12
  Bottom Layer w0.15: R13.2 R9.1 -5.504,4.319 -5.504,1.396 -4.953,0.845 v1(-4.953,0)
ADC_CURR_W: D3.13 D4.23 R10.1 R14.2 | length 12.6
  Top Layer w0.15: D4.23 -5.823,0.4 v1(-5.588,0.635) -4.097,0.635 -3.046,-0.416 -1.111,-0.416 -0.125,-1.403 D3.13
  Bottom Layer w0.15: R14.2 R10.1 -6.185,1.232 v1(-5.588,0.635)
ADC_VIN: C2.2 D3.14 R4.1 R5.2 | length 10.4
  Top Layer w0.15: C2.2 R5.2 R4.1 -3.881,-4.699 -3.052,-3.87 0.217,-3.87 0.525,-3.561 D3.14
GND: C1.1 C2.1 C3.1 C4.1 C6.1 C7.1 C8.1 C9.1 C10.1 C11.1 D1.4 D1.5 D1.8 D2.5 D3.5 D4.8 D4.12 D4.15 D4.17 D4.25 R5.1 R7.1 R12.1 R13.1 R14.1 R15.1 V1.2 X1.5 X2.1 | length 39.1
  Top Layer w0.2: v1(-10.922,-1.524) -10.605,-1.207 D4.12 -9.455,-0.8 D4.25@-9.055,-0.4 ; v1(-10.922,1.524) -10.605,1.207 D4.8 -9.455,0.8 D4.25 ; D4.15 D4.25@-9.055,-0.4 ; D4.17 -8.255,-0.4 D4.25 ; v1(-7.874,-5.969) R5.1 ; C6.1 v1(-4.445,-3.175) ; D4.25@-9.055,-0.4 D4.25
  Top Layer w0.3: C2.1 v1(-2.31,-5.969) ; R15.1 v1(1.689,-8) ; D3.5 v1(1.825,5) ; R7.1 v1(7,-5) ; C3.1 v1(10,4.5)
  Top Layer w0.5: V1.2 v1(-7,-7.5)
  Bottom Layer w0.15: R14.1 R13.1 R12.1
  Bottom Layer w0.2: v1(-9.5,5) R13.1
  Bottom Layer w0.3: v1(-9,-11) C10.1 C11.1 v1(-5,-11) ; D1.4 v1(-2.7,3) ; v1(0.7,-4.699) C1.1 ; v1(1.825,5) C8.1 C9.1 2.654,1.951 D1.5 ; D1.8 3.123,-1.905 3.648,-2.43 3.648,-2.969 v1(4.425,-3.747) ; D2.5 v1(12.2,1.702) ; C7.1 X1.5
  other v1: -13.589,-6.477 -13.589,-5.461 -13.589,-4.445
I2C1_SCL: D1.7 D3.1 R3.1 | length 8.5
  Top Layer w0.15: D3.1 5.039,3.51 6.5,2.049 v1(6.5,1.5)
  Bottom Layer w0.15: D1.7 4.32,-0.635 R3.1 5.5,0.185 5.5,1 6,1.5 v1(6.5,1.5)
I2C1_SDA: D1.6 D3.2 R2.1 | length 6.5
  Top Layer w0.15: D3.2 3.775,2.327 4.083,2.019 v1(5.455,2.019)
  Bottom Layer w0.15: D1.6 4.32,0.635 R2.1 5.455,1.77 v1(5.455,2.019)
nBUSY: D3.3 R1.1 X1.2 | length 16.5
  Top Layer w0.15: D3.3 3.125,4.941 3.52,5.336 11.814,5.336 X1.2
  Bottom Layer w0.15: R1.1 13.185,2.5 X1.2
NetC5_1: C5.1 D4.14 | length 2
  Top Layer w0.2: C5.1 -9.455,-2.405 D4.14
NetR15_2: R15.2 V2.2 | length 1.5
  Top Layer w0.3: V2.2 -0.685,-6.565 R15.2
nRST: C3.2 D3.6 R6.2 | length 11.4
  Top Layer w0.15: D3.6 1.175,2.314 2.578,0.911 6.759,0.911 7.815,1.968 R6.2 7.815,4.485 C3.2
nSLEEP: D4.24 R11.1 | length 2.2
  Top Layer w0.15: D4.24 -6.705,2.98 R11.1
Phase_A: D4.9 X3.1 | length 2.6
  Top Layer w0.2: -11.5,0.635 -11.265,0.4 D4.9
  Top Layer w0.4: v2(-12.305,1.9) -11.5,1.095 -11.5,0.635
  other v2: -14.505,1.9 -13.405,1.9 -14.505,2.5 -13.405,2.5 -12.305,2.5 -14.505,3.1 -13.405,3.1 -12.305,3.1
Phase_B: D4.10 X4.1 | length 4.2
  Top Layer w0.2: -11.643,0 D4.10
  Top Layer w0.4: v2(-12.305,0) -12.28,0 -11.643,0
  Top Layer w0.5: v2(-13.405,0) -13.71,0.305 -13.465,0.261 -13.362,0.243 -12.399,0.071 -12.296,0.053 -12.28,0.05 -12.28,0 v2(-12.305,0) X4.1@-12.805,0
  other v2: -14.505,-0.6 -13.405,-0.6 -12.305,-0.6 -14.505,0 -14.505,0.6 -13.405,0.6 -12.305,0.6
Phase_C: D4.11 X5.1 | length 2.6
  Top Layer w0.2: -11.5,-0.635 -11.265,-0.4 D4.11
  Top Layer w0.4: v2(-12.305,-1.9) -11.5,-1.095 -11.5,-0.635
  other v2: -14.505,-3.1 -13.405,-3.1 -12.305,-3.1 -14.505,-2.5 -13.405,-2.5 -12.305,-2.5 -14.505,-1.9 -13.405,-1.9
PWM_ENABLE: D3.17 D4.1 D4.2 D4.3 V2.1 | length 20.1
  Top Layer w0.15: D4.3 D4.2 ; v1(-8.104,2.316) -7.855,2.067 D4.2 ; D4.1 D4.2 ; v1(-2.026,-4.502) -1.067,-5.461 0.745,-5.461 ; V2.1 0.75,-5.466 0.745,-5.461 ; D3.17 2.475,-3.072 1.689,-3.858 1.689,-5.092 1.321,-5.461 0.745,-5.461
  Bottom Layer w0.15: v1(-8.104,2.316) -8.104,0.754 -6.007,-1.343 -5.185,-1.343 v1(-2.026,-4.502)
PWM_U: D3.15 D4.4 | length 15.8
  Top Layer w0.15: D4.4 -8.655,3.164 -8.009,3.811 -4.858,3.811 -4.277,3.229 -4.277,1.482 -2.787,-0.007 -0.211,-0.007 1.175,-1.394 D3.15
PWM_V: D3.16 D4.5 | length 17.3
  Top Layer w0.15: D4.5 -9.055,3.303 -8.182,4.176 -4.657,4.176 -3.883,3.402 -3.883,1.655 -2.637,0.41 0.013,0.41 1.825,-1.402 D3.16
PWM_W: D3.20 D4.6 | length 20.7
  Top Layer w0.15: D4.6 -9.455,3.51 -8.376,4.589 -4.446,4.589 -3.478,3.622 -3.478,1.853 -2.421,0.795 0.221,0.795 1.861,-0.844 3.873,-0.844 4.425,-1.396 D3.20
RS485_A: D2.6 X1.3 | length 2.8
  Bottom Layer w0.3: D2.6 13.785,-0.865 X1.3
RS485_B: D2.7 X1.4 | length 2.6
  Bottom Layer w0.3: D2.7 14.285,-2.135 X1.4
SWCLK-BOOT0: D3.19 R7.2 X2.3 | length 19.8
  Top Layer w0.15: D3.19 3.775,-3.916 v1(3.13,-4.561) 3.568,-5 R7.2
  Bottom Layer w0.15: X2.3 -1.27,6.77 -0.5,6 -0.5,-0.932 v1(3.13,-4.561)
SWDIO: D3.18 X2.2 | length 16.6
  Top Layer w0.15: v1(3.125,-3.747) D3.18
  Bottom Layer w0.15: X2.2 1.27,7.381 0,6.111 0,-0.622 v1(3.125,-3.747)
UART2_DE: D2.2 D2.3 D3.8 | length 16.1
  Top Layer w0.15: D3.8 -0.125,2.233 0.116,1.992 0.745,1.992 2.251,0.486 6.918,0.486 7.621,1.189 8.606,1.189 9,0.795 9,0.16 v1(7.975,-0.865)
  Bottom Layer w0.15: D2.2 D2.3 v1(7.975,-0.865)
UART2_RX: D2.1 D3.10 | length 14.6
  Top Layer w0.15: D3.10 -1.425,1.609 -1.006,1.189 0.408,1.189 1.983,-0.386 4.191,-0.386 7.21,-3.405 v1(7.975,-3.405)
  Bottom Layer w0.15: D2.1 v1(7.975,-3.405)
UART2_TX: D2.4 D3.9 | length 12.5
  Top Layer w0.15: D3.9 -0.775,1.812 -0.55,1.588 0.587,1.588 2.124,0.051 7.621,0.051 v1(7.975,0.405)
  Bottom Layer w0.15: D2.4 v1(7.975,0.405)
VIN: C4.2 C5.2 C10.2 D4.7 D4.13 D4.16 J1.1 R4.2 TP1.1 V1.3 X1.1 | length 41.7
  Top Layer w0.2: TP1.1 -10.392,4.892 v1(-10.392,2.1) -9.855,1.563 D4.7 ; v1(-10.392,-2.1) -9.855,-1.563 D4.13 ; v1(-8.763,-4.445) -8.509,-4.699 R4.2 ; v1(-8.714,-2.287) -8.655,-2.228 D4.16
  Top Layer w0.5: V1.3 v1(-8.5,-7.5)
  Top Layer w1: v1(-12.5,6) v1(-12,6.5) v1(-11,7.5) 5.908,7.5 7.21,6.198 13.452,6.198 X1.1
  Bottom Layer w0.2: C10.2 -8.8,-9 J1.1
  Bottom Layer w0.5: C10.2 -9,-8 v1(-8.5,-7.5)
  other v1: -8.763,-6.477 -8.763,-5.461 -11.5,7
pads on no net: D4.19 D4.20

## Polygon pours and split planes (outlines as drawn)
+3V3 on MidLayer2 "+3V3_L03_P001" (solid, pour order 1): -7.62,-16.51 18,-16.51 18,15.875 -7.62,15.875
VIN on MidLayer2 "VIN_L03_P002" (solid, pour order 2): -7.62,15.875 -7.62,-16.51 -16.51,-16.51 -16.51,15.875
VIN on Top Layer "VIN_L01_P004" (solid, pour order 4): -9.525,-6.604 -9.271,-6.858 -8.509,-6.858 -8.382,-6.731 -8.382,-3.683 -8.509,-3.556 -9.144,-3.556 -9.525,-3.937
GND on Top Layer "GND_L01_P003" (solid, pour order 3): -12.827,-4.318 -13.081,-4.064 -13.843,-4.064 -13.97,-4.191 -13.97,-6.731 -13.843,-6.858 -13.081,-6.858 -12.827,-6.604
GND on MidLayer1 "GND_L02_P000" (solid, pour order 0): -17.145,16.51 -17.145,-16.51 18,-16.51 18,16.51

## Silkscreen, mask and mechanical layers (free items; w line width, h text height)
Top Overlay:
  drawing of 3 lines, arcs and shapes, not listed
  text ".PCB_Title" at -4.198,13.712 h1.2
  text ".Schematic_DrawnBy" at -2.838,12.513 h1.2
  text ".Schematic_DrawnDate" at -2.624,11.513 h1.2
  text "3" at -4.004,7.013 h1.2
  text "C" at -1.584,7.013 h1.2
  text "D" at 0.929,7 h1.2
  text "G" at 3.392,7.013 h1.2
  text "VIN" at -11.709,6 h1
  text "3V3" at -1.018,5.684 h1
  text "+" at 10.465,4.622 h1.2
  text "U" at -11.684,2.163 h1.2
  text "b" at 10.458,2.123 h1.2
  text "V" at -12.192,-0.383 h1.2
  text "A" at 10.231,-0.383 h1.2
  text "B" at 10.358,-2.883 h1.2
  text "W" at -11.684,-2.923 h1.2
  text "–" at 10.405,-5.277 h1.2
  text "5V" at -3.38,-9.237 h1.2
Bottom Overlay:
  text "JLCJLCJLCJLC" at 3.346,7.261 h1
Board:
  lines w0.1: 14.021,7.707 16.929,7.707 16.929,-7.707 14.021,-7.707 cw(c0,0) -15.235,-4.888 -15.235,4.927 cw(c0,0) 14.032,7.713
Mech_Add:
  circle w0.1: c-9,10 r3
  circle w0.1: c9,10 r3
  circle w0.1: c0,-13 r3
Drill Drawing:
  drawing of 390 lines, arcs and shapes, not listed
  text "Layer" at 6.055,-38.061 h1.48
  text "Name" at 12.26,-38.061 h1.48
  text "Material" at 24.254,-38.061 h1.48
  text "Thickness" at 35.035,-38.061 h1.48
  text "Constant" at 43.89,-38.061 h1.48
  text "Gerber" at 52.089,-38.061 h1.48
  text "Board Layer Stack" at 59.13,-38.061 h1.48
  text "Top Overlay" at 12.26,-41.029 h1.48
  text "GTO" at 52.089,-41.029 h1.48
  text "Top Solder" at 12.26,-43.997 h1.48
  text "Solder Resist" at 24.254,-43.997 h1.48
  text "0.010mm" at 35.035,-43.997 h1.48
  text "3.5" at 43.89,-43.997 h1.48
  text "GTS" at 52.089,-43.997 h1.48
  text "Symbol" at -107.827,-44.529 h1.83
  text "Count" at -100.203,-44.529 h1.83
  text "Hole Size" at -93.31,-44.529 h1.83
  text "Hole Length" at -78.311,-44.529 h1.83
  text "Plated" at -67.204,-44.529 h1.83
  text "Hole Type" at -60.63,-44.529 h1.83
  text "Drill Layer Pair" at -51.112,-44.529 h1.83
  text "Via/Pad" at -32.759,-44.529 h1.83
  text "Pad Shape" at -25.067,-44.529 h1.83
  text "1" at 6.055,-46.965 h1.48
  text "Top Layer" at 12.26,-46.965 h1.48
  text "0.035mm" at 35.035,-46.965 h1.48
  text "GTL" at 52.089,-46.965 h1.48
  text "78" at -100.203,-47.679 h1.52
  text "0.300mm (11.81mil)" at -93.31,-47.679 h1.52
  text "-" at -78.311,-47.679 h1.52
  text "PTH" at -67.204,-47.679 h1.52
  text "Round" at -60.63,-47.679 h1.52
  text "Top Layer - Bottom Layer" at -51.112,-47.679 h1.52
  text "Via" at -32.759,-47.679 h1.52
  text "Rounded" at -25.067,-47.679 h1.52
  text "Dielectric1" at 12.26,-49.933 h1.48
  text "FR-4 (7628)" at 24.254,-49.933 h1.48
  text "0.180mm" at 35.035,-49.933 h1.48
  text "4.2" at 43.89,-49.933 h1.48
  text "5" at -100.203,-50.829 h1.52
  text "0.900mm (35.43mil)" at -93.31,-50.829 h1.52
  text "-" at -78.311,-50.829 h1.52
  text "PTH" at -67.204,-50.829 h1.52
  text "Round" at -60.63,-50.829 h1.52
  text "Top Layer - Bottom Layer" at -51.112,-50.829 h1.52
  text "Pad" at -32.759,-50.829 h1.52
  text "(Mixed)" at -25.067,-50.829 h1.52
  text "Dielectric 2" at 12.26,-52.901 h1.48
  text "FR-4 (7628)" at 24.254,-52.901 h1.48
  text "0.180mm" at 35.035,-52.901 h1.48
  text "4.2" at 43.89,-52.901 h1.48
  text "4" at -100.203,-53.979 h1.52
  text "1.100mm (43.31mil)" at -93.31,-53.979 h1.52
  text "-" at -78.311,-53.979 h1.52
  text "PTH" at -67.204,-53.979 h1.52
  text "Round" at -60.63,-53.979 h1.52
  text "Top Layer - Bottom Layer" at -51.112,-53.979 h1.52
  text "Pad" at -32.759,-53.979 h1.52
  text "(Mixed)" at -25.067,-53.979 h1.52
  text "2" at 6.053,-55.869 h1.48
  text "MidLayer1" at 12.26,-55.869 h1.48
  text "0.035mm" at 35.035,-55.869 h1.48
  text "G1" at 52.089,-55.869 h1.48
  text "3" at -100.203,-57.13 h1.52
  text "3.000mm (118.11mil)" at -93.31,-57.13 h1.52
  text "-" at -78.311,-57.13 h1.52
  text "NPTH" at -67.204,-57.13 h1.52
  text "Round" at -60.63,-57.13 h1.52
  text "Top Layer - Bottom Layer" at -51.112,-57.13 h1.52
  text "Pad" at -32.759,-57.13 h1.52
  text "Rounded" at -25.067,-57.13 h1.52
  text "Core" at 12.26,-58.837 h1.48
  text "0.710mm" at 35.035,-58.837 h1.48
  text "4.2" at 43.89,-58.837 h1.48
  text "90 Total" at -100.203,-60.28 h1.52
  text "3" at 6.055,-61.805 h1.48
  text "MidLayer2" at 12.26,-61.805 h1.48
  text "0.035mm" at 35.035,-61.805 h1.48
  text "G2" at 52.089,-61.805 h1.48
  text "Dielectric 3" at 12.26,-64.773 h1.48
  text "FR-4 (7628)" at 24.254,-64.773 h1.48
  text "0.180mm" at 35.035,-64.773 h1.48
  text "4.2" at 43.89,-64.773 h1.48
  text "Dielectric 4" at 12.26,-67.741 h1.48
  text "FR-4 (7628)" at 24.254,-67.741 h1.48
  text "0.180mm" at 35.035,-67.741 h1.48
  text "4.2" at 43.89,-67.741 h1.48
  text "4" at 6.055,-70.709 h1.48
  text "Bottom Layer" at 12.26,-70.709 h1.48
  text "0.035mm" at 35.035,-70.709 h1.48
  text "GBL" at 52.089,-70.709 h1.48
  text "Bottom Solder" at 12.26,-73.678 h1.48
  text "Solder Resist" at 24.254,-73.678 h1.48
  text "0.010mm" at 35.035,-73.678 h1.48
  text "3.5" at 43.89,-73.678 h1.48
  text "GBS" at 52.089,-73.678 h1.48
  text "Bottom Overlay" at 12.26,-76.646 h1.48
  text "GBO" at 52.089,-76.646 h1.48
  text "Total board thickness:" at 6.055,-79.614 h1.48
  text "1.590mm" at 35.035,-79.614 h1.48